# Altium PCB OpenRing-V1R0-MainBoard.PcbDoc (part 2 of 3)
Units mm, origin at the board's own origin, x right, y up, seen from the top; angles counter-clockwise.
Board outline 50.5 x 8.5 mm, 4 copper layers (Top Layer, Layer 1, Layer 2, Bottom Layer), stack 0.148 mm thick; 74 components, 58 nets, 273 pads, 106 vias.
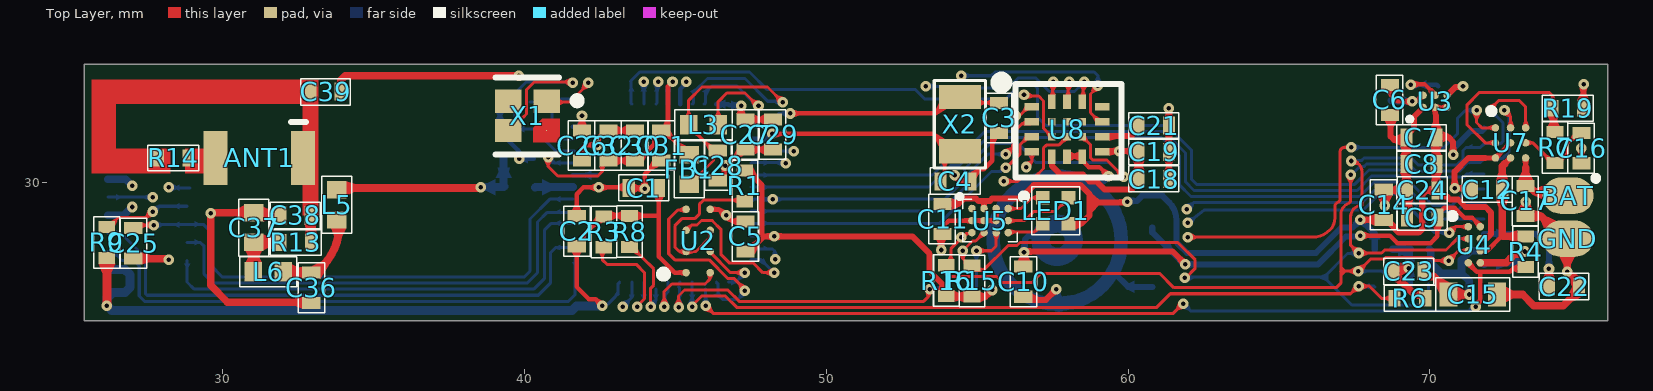
[diagram p0: Top Layer view]

## Part data (continued)
R4: library part ERJ-2RKF1003X, "RES SMD 100K OHM 1% 1/10W 0402", Manufacturer="Panasonic Electronic Components", Operating Temperature="-55°C ~ 155°C", Package / Case="0402 (1005 Metric)", Power (Watts)="0.1W, 1/10W", Resistance (Ohms)=100k, Supplier Device Package=0402, Supplier Part Number 1=P100KLDKR-ND, Temperature Coefficient=±100ppm/°C, Tolerance=±1%, Category=Resistors, ComponentLink1Description=https://industrial.panasonic.com/cdbs/www-data/pdf/RDA0000/AOA0000C283.pdf, ComponentLink1URL=https://industrial.panasonic.com/cdbs/www-data/pdf/RDA0000/AOA0000C283.pdf, Composition="Thick Film", Failure Rate=-, Features="Automotive AEC-Q200", Height - Seated (Max)="0.016\" (0.40mm)", Manufacturer Part Number=ERJ-2RKF1003X, Number of Terminations=2, Packaging=Digi-Reel®, Part Status=Active, Pricing 1="1=0.1, 10=0.025, 25=0.018, 50=0.0136, 100=0.01, 250=0.00764, 500=0.00612, 1000=0.00451, 5000=0.00323 (USD)", RoHS="RoHS Compliant", Size / Dimension="0.039\" L x 0.020\" W (1.00mm x 0.50mm)", Stock 1=5976308, Supplier 1=Digi-Key
R13 R14: library part ERJ-2GE0R00X, "RES SMD 0.0OHM JUMPER 1/10W 0402", Manufacturer="Panasonic Electronic Components", Operating Temperature="-55°C ~ 155°C", Package / Case="0402 (1005 Metric)", Power (Watts)="0.1W, 1/10W", Resistance (Ohms)=0.0, Supplier Device Package=0402, Supplier Part Number 1=P0.0JDKR-ND, Temperature Coefficient=-, Tolerance=Jumper, Category=Resistors, ComponentLink1Description=http://industrial.panasonic.com/www-cgi/jvcr13pz.cgi?E+PZ+3+AOA0001+ERJ2GE0R00X+7+WW, ComponentLink1URL=http://industrial.panasonic.com/www-cgi/jvcr13pz.cgi?E+PZ+3+AOA0001+ERJ2GE0R00X+7+WW, Composition="Thick Film", Features="Automotive AEC-Q200", Height="0.016\" (0.40mm)", Manufacturer Part Number=ERJ-2GE0R00X, Number of Terminations=2, Packaging=Digi-Reel®, Part Status=Active, Pricing 1="1=0.07, 50=0.0104, 100=0.0078, 250=0.00584, 500=0.0043, 1000=0.00287, 5000=0.00202 (GBP)", RoHS="RoHS Compliant", Size / Dimension="0.039\" L x 0.020\" W (1.00mm x 0.50mm)", Stock 1=6022701, Supplier 1=Digi-Key
R15 R16: library part ERJ-2RKF1501X, "RES SMD 1.5K OHM 1% 1/10W 0402", Manufacturer="Panasonic Electronic Components", Operating Temperature="-55°C ~ 155°C", Package / Case="0402 (1005 Metric)", Power (Watts)="0.1W, 1/10W", Resistance (Ohms)=1.5k, Supplier Device Package=0402, Supplier Part Number 1=P1.50KLDKR-ND, Temperature Coefficient=±100ppm/°C, Tolerance=±1%, Category=Resistors, ComponentLink1Description=https://industrial.panasonic.com/cdbs/www-data/pdf/RDA0000/AOA0000C283.pdf, ComponentLink1URL=https://industrial.panasonic.com/cdbs/www-data/pdf/RDA0000/AOA0000C283.pdf, Composition="Thick Film", Failure Rate=-, Features="Automotive AEC-Q200", Height - Seated (Max)="0.016\" (0.40mm)", Manufacturer Part Number=ERJ-2RKF1501X, Number of Terminations=2, Packaging=Digi-Reel®, Part Status=Active, Pricing 1="1=0.1, 10=0.025, 25=0.018, 50=0.0136, 100=0.01, 250=0.00764, 500=0.00612, 1000=0.00451, 5000=0.00323 (USD)", RoHS="RoHS Compliant", Size / Dimension="0.039\" L x 0.020\" W (1.00mm x 0.50mm)", Stock 1=1349197, Supplier 1=Digi-Key
R19: library part ERJ-2RKF1002X, "RES SMD 10K OHM 1% 1/10W 0402", Manufacturer="Panasonic Electronic Components", Operating Temperature="-55°C ~ 155°C", Package / Case="0402 (1005 Metric)", Power (Watts)="0.1W, 1/10W", Resistance (Ohms)=10k, Supplier Device Package=0402, Supplier Part Number 1=P10.0KLDKR-ND, Temperature Coefficient=±100ppm/°C, Tolerance=±1%, Category=Resistors, ComponentLink1Description=https://industrial.panasonic.com/cdbs/www-data/pdf/RDA0000/AOA0000C283.pdf, ComponentLink1URL=https://industrial.panasonic.com/cdbs/www-data/pdf/RDA0000/AOA0000C283.pdf, Composition="Thick Film", Failure Rate=-, Features="Automotive AEC-Q200", Height - Seated (Max)="0.016\" (0.40mm)", Manufacturer Part Number=ERJ-2RKF1002X, Number of Terminations=2, Packaging=Digi-Reel®, Part Status=Active, Pricing 1="1=0.1, 10=0.025, 25=0.018, 50=0.0136, 100=0.01, 250=0.00764, 500=0.00612, 1000=0.00451, 5000=0.00323 (USD)", RoHS="RoHS Compliant", Size / Dimension="0.039\" L x 0.020\" W (1.00mm x 0.50mm)", Stock 1=8105773, Supplier 1=Digi-Key
U1: library part NRF54L15-QFAA-R, "nRF54L15 SoC with Arm Cortex-M33 processor", Manufacturer="Nordic Semiconductor", Supplier Part Number=949-NRF54L15-QFAA-R, Category="RF Receivers, Transceivers", Manufacturer Part Number=NRF54L15-QFAA-R, Pricing="1=6.84, 10=6.11, 50=6.11, 100=5.02, 1000=3.62, 10000=3.07 (USD)", RoHS=No, Stock=719, Supplier=Mouser
U2: "M95P32-I Series 32 Mb (4 M x 8) 80 MHz SPI EEPROM Memory IC - WLCSP-8", Manufacturer=STMicroelectronics, Supplier Part Number=497-M95P32-IXCST/EFDKR-ND, Supplier Part Number 1=511-M95P32-IXCST/EF, Category=Memory, Manufacturer Part Number=M95P32-IXCST/EF, Pricing="1=2.68, 10=2.409, 25=2.2724, 100=1.9362, 250=1.818, 500=1.59076, 1000=1.31805, 2500=1.22715 (USD)", RoHS=No, Stock=9222, Supplier=Digikey, Supplier 1=Mouser, Supplier 2=Digikey, Supplier Part Number 2=497-M95P32-IXCST/EFCT-ND
U3: "Conv DC-DC 1.8V to 6.5V Synchronous Step Down Single-Out 1.8V to 3.3V 0.75A 6-Pin DSBGA T/R", Manufacturer="Texas Instruments", Supplier Part Number=595-TPS62840YBGR, Category="Voltage Regulators - Switching", Manufacturer Part Number=TPS62840YBGR, Pricing="1=1,97, 10=1,77, 50=1,77, 100=1,42, 1000=0,972, 10000=0,865 (USD)", RoHS=Yes, Stock=2271, Supplier=Mouser, Supplier 1=Mouser, Supplier Part Number 1=595-TPS62840YBGR
U4: "1-A Li-ion I²C programmable charger with regulated power path in WCSP package 8-DSBGA -40 to 85", Manufacturer="Texas Instruments", Supplier Part Number=296-BQ25180YBGRCT-ND, Supplier Part Number 1=595-BQ25180YBGR, Category="Integrated Circuits (ICs)", Manufacturer Part Number=BQ25180YBGR, Pricing="1=2,65, 10=2,382, 25=2,2472, 100=1,9147, 250=1,7978, 500=1,57308, 1000=1,3034 (USD)", RoHS=No, Stock=2812, Supplier=Digi-Key, Supplier 1=Mouser
U5: library part LP5562TME/NOPB, "IC LED DRIVER LINEAR DIM 25.5MA", Current - Output / Channel=25.5mA, Frequency="256kHz, 558kHz", Manufacturer="Texas Instruments", Operating Temperature="-40°C ~ 85°C (TA)", Package / Case="12-WFBGA, DSBGA", Supplier Device Package=12-DSBGA, Supplier Part Number 1=296-39060-6-ND, Voltage - Output=-, Voltage - Supply (Max)=5.5V, Voltage - Supply (Min)=2.7V, Applications=Backlight, Category="Integrated Circuits (ICs)", ComponentLink1Description=http://www.ti.com/lit/ds/symlink/lp5562.pdf, ComponentLink1URL=http://www.ti.com/lit/ds/symlink/lp5562.pdf, Dimming=I²C, Internal Switch(s)=Yes, Manufacturer Part Number=LP5562TME/NOPB, Mounting Type="Surface Mount", Number of Outputs=4, Packaging=Digi-Reel®, Part Status=Active, Pricing 1="1=1.34, 10=1.195, 100=0.9314 (USD)", RoHS="RoHS Compliant", Stock 1=4154, Supplier 1=Digi-Key, Topology=-, Type=Linear
U6: "1.5A output current, buck-boost MicroSiP™ power module with integrated inductor with I²C 8-uSiP -40 to 125", Manufacturer="Texas Instruments", Supplier Part Number=595-TPSM83102SIUR, Length=2.6mm, Manufacturer Part Number=TPSM83102SIUR, Pins=8, Pricing="1=6.7, 10=6.01, 50=6.01, 100=4.93, 1000=4.51, 10000=3.83 (USD)", RoHS=No, Stock=2997, Supplier=Mouser, Supplier 1=Mouser, Supplier 2=Digikey, Supplier Part Number 1=595-TPSM83102SIUR, Supplier Part Number 2=296-TPSM83102SIURCT-ND, Thickness=1.15mm, Topology=Buck-Boost, Width=2mm
U7: "Single-cell battery fuel gauge with pre-programmed chemistry and integrated sense resistor 9-DSBGA -40 to 85", Manufacturer="Texas Instruments", Supplier Part Number=595-BQ27427YZFR, Manufacturer Part Number=BQ27427YZFR, Pricing="1=2,56, 10=2,31, 50=2,18, 100=1,86, 1000=1,26, 10000=1,15 (USD)", RoHS=No, Stock=1221, Supplier=Mouser, Supplier 1=Mouser, Supplier Part Number 1=595-BQ27427YZFR
U8: "Programmable smart sensor combining accelerometer, gyroscope and fusion software", Manufacturer="Bosch Tools", Supplier Part Number=828-BHI360DKR-ND, Category=Uncategorized, Checked=TRUE, Manufacturer Part Number=BHI360, Pricing="1=6.54, 10=5.232, 25=4.8396, 100=4.1854, 500=3.92384, 1000=3.66226 (USD)", RoHS=No, Stock=17060, Supplier=Digikey, Supplier 1=Digikey, Supplier 2=Mouser, Supplier Part Number 1=828-BHI360DKR-ND, Supplier Part Number 2=262-BHI360
X1: library part ABM11W-32.0000MHZ-8-B1U-T3, "CRYSTAL 32.0000MHZ 8PF SMD, 2x1.6mm, RoHS", Manufacturer=Abracon, Supplier Part Number=535-13899-1-ND, Supplier Part Number 1=815-11W32-8B1UT, Category=Crystals, Checked=TRUE, ComponentLink1Description=https://abracon.com/Resonators/ABM11W.pdf?src-supplier=Digikey, ComponentLink1URL=https://abracon.com/Resonators/ABM11W.pdf?src-supplier=Digikey, ComponentLink2Description=https://datasheet.octopart.com/ABM11W-32.0000MHZ-8-B1U-T3-Abracon-datasheet-112015802.pdf?src-supplier=Master+Electronics, ComponentLink2URL=https://datasheet.octopart.com/ABM11W-32.0000MHZ-8-B1U-T3-Abracon-datasheet-112015802.pdf?src-supplier=Master+Electronics, Frequency="32 MHz", Manufacturer Part Number=ABM11W-32.0000MHZ-8-B1U-T3, Pricing="1=0.82, 10=0.709, 50=0.6394, 100=0.6115, 500=0.5517, 1000=0.52788 (USD)", RoHS=Yes, Stock=52771, Supplier=Digikey, Supplier 1=Mouser, Supplier 2=Digikey, Supplier 3=Digikey, Supplier 4=Digikey, Supplier Part Number 2=535-13899-1-ND, Supplier Part Number 3=535-13899-6-ND, Supplier Part Number 4=535-13899-2-ND
X2: library part ABS06-32.768KHZ-1-T, "CRYSTAL 32.768 KHZ 12.5 PF SMD", ESR (Equivalent Series Resistance)="90 kOhm", Frequency Stability=-, Frequency Tolerance=±10ppm, Load Capacitance=12.5pF, Manufacturer="Abracon Corporation", Operating Mode=Fundamental, Operating Temperature="-40°C ~ 85°C", Package / Case=2-SMD, Supplier Part Number 1=535-10248-6-ND, Category="Crystals and Oscillators", ComponentLink1Description=http://www.abracon.com/Resonators/ABS06.pdf, ComponentLink1URL=http://www.abracon.com/Resonators/ABS06.pdf, Frequency=32.768kHz, Height="0.024\" (0.60mm)", Manufacturer Part Number=ABS06-32.768KHZ-1-T, Mounting Type="Surface Mount", Packaging=Digi-Reel®, Pricing 1="1=2.25, 10=1.952, 50=1.711, 100=1.3508, 500=1.14066, 750=0.99659, 1000=0.90053 (EUR)", Ratings=-, RoHS="RoHS Compliant", Size / Dimension="0.079\" L x 0.047\" W (2.00mm x 1.20mm)", Stock 1=6467, Supplier 1=Digi-Key, Type="kHz Crystal (Tuning Fork)"

## Via types
v1: diameter 0.35, hole 0.15, Top Layer to Bottom Layer, tented both sides, 106 vias

## Nets (pads, with @x,y where several pads share a name; then routed paths per layer and width w, separated by ;. In a path a pad name is that pad's centre, name@x,y a point inside that pad or via, vN(x,y) a via of type N, cw(c..) or ccw(c..) an arc to the next point about the centre after c; other vN are vias at no path point)
1V8: C1.1 C2.1 C5.2 C6.1 C18.2 C19.2 C22.2 C26.1 C27.1 C29.1 L1.2 P2.1 P3.8 R1.2 R3.1 R8.1 R9.1 R15.1 R16.1 U1.10 U1.22 U1.36 U1.47 U1.48 U2.A2 U3.A2 U8.5 U8.8 | length 94
  Top Layer w0.15: C2.1@41.725,27.875 41.725,26.525 42.127,26.123 42.352,26.123 v1(42.575,25.9) ; C26.1@41.9,31.71 v1(41.9,32.2) ; C2.1@41.925,27.775 41.95,27.8 41.95,28.245 R3.1@42.4,28.695 ; R3.1@42.525,28.895 42.6,28.895 42.605,28.89 R8.1@43.475,28.89 ; R8.1@43.475,28.885 44.44,28.885 44.45,28.875 ; C1.1@44.45,29.85 C1.1@44.45,29.8 44.45,28.875 ; U2.A2@45.35,27 44.975,27 44.45,27.525 44.45,28.875 ; v1@47.175,32.52 47.175,32.2 47.3,32.075 C29.1@48.225,32.075 ; R1.2@47.3,30.385 R1.2@47.375,30.385 ; C6.1@68.7,33.2 68.7,32.89 68.915,32.675 v1(69.425,32.675) 69.463,32.713 69.586,32.713 69.748,32.875 U3.A2@69.775,32.875
  Top Layer w0.2: C5.2@47.325,27.7 47.425,27.7 47.925,28.2 ; R1.2@47.375,30.385 47.85,29.91 47.85,28.2 v1(48.275,28.2) 52.85,28.2 53.425,27.625 53.425,27.037 53.857,26.605 53.857,26.325 53.957,26.225 R16.1@53.975,26.225 54.004,26.196 54.825,26.196 54.826,26.195 55.27,26.195 v1(55.5,26.425) ; U8.5@57.475,30.862 U8.5@57.475,30.837 57.475,30.542 57.767,30.25 58.499,30.25 58.724,30.025 58.95,30.025 59.225,29.75 60.1,29.75 60.35,30 C18.2@60.35,30.1 60.35,30.975 C19.2@60.339,30.986 ; U8.8@59.138,31.025 v1(59.7,31.025) 59.95,31.025 60.325,31.025 C19.2@60.35,31 ; C22.2@73.95,26.525 v1(73.95,27.125)
  Top Layer w0.3: v1(26.15,25.9) R9.1@26.15,27.49
  Layer 2 w0.3: v1(42.575,25.9) 42.8,26.125 42.8,27.9 ; 42.775,27.95 41.9,28.825 v1(41.9,32.2) 43.427,32.2 43.777,31.85 46.5,31.85 v1(47.175,32.525) ; 42.8,27.95 42.8,27.9 ; v1(48.275,28.2) 43.274,28.2 43.024,27.95 42.85,27.95 42.8,27.9 ; v1(55.5,26.425) 56.225,27.15 56.875,27.15 57.875,28.15 57.875,30.35 58.55,31.025 v1(59.7,31.025) 60.575,31.9 69.175,31.9
  Bottom Layer w0.1: 42.75,25.948 43,26.198 43,26.21 43.1,26.31 43.1,26.635 U1.22@43.15,26.685
  Bottom Layer w0.15: U1.36@41.6,31.835 41.875,31.835 41.9,31.86 v1(41.9,32.2) ; U1.47@46.35,32.585 U1.48@46.75,32.585 46.75,32.575 46.775,32.55 v1@47.175,32.55 ; U1.10@47.5,28.235 47.825,28.235 47.85,28.21 47.928,28.21 47.938,28.2 v1@48.268,28.2
  Bottom Layer w0.2: L1.2@68.7,32.7 68.725,32.675 v1(69.425,32.675) ; P3.8@71.8,28.275 73.525,28.275 73.95,27.85 v1(73.95,27.125) v1@73.975,27.1
  Bottom Layer w0.3: P2.1@26.19,27.1 26.749,27.1 26.925,26.924 26.925,26.516 26.749,26.34 26.343,26.34 26.16,26.157 26.16,25.91 v1(26.15,25.9) 26.164,25.9 26.314,25.75 41.574,25.75 41.724,25.9 v1(42.575,25.9)
CHG_AC: AC.1 C9.1 C10.2 P1.1 U4.A2 | length 20
  Top Layer w0.15: v1(67.7,28.225) 68.678,28.225 68.928,27.975 70.025,27.975 70.25,28.2 C9.1@70.25,28.825 70.25,28.925 70.475,29.15 70.82,29.15 71.145,28.825 71.399,28.825 71.675,28.549 U4.A2@71.675,28.525
  Top Layer w0.2: C10.2@56.55,27.3 v1(56.55,27.675) 56.575,27.7 61.475,27.7 v1(61.9,27.275)
  Bottom Layer w0.2: v1(56.55,27.675) 56.579,27.704 56.579,28.095 56.696,28.212 57.038,28.212 57.05,28.2 ; AC.1@60.8,28.5 60.8,28.334 v1@61.859,27.275 ; v1(61.9,27.275) 66.3,27.275 67.221,28.196 67.671,28.196 v1(67.7,28.225)